# EAGLE board untitled (EAGLE 8.3.1)

Size 160 x 100 mm. Coordinates in mm from the lower left corner, seen from the top.
Outline: 0,0 160,0 160,100 0,100 0,0
Copper layers (1*16): Top 0.035mm / dielectric 1.5mm / Bottom 0.035mm
Design rules "default": minimum track width 6mil, minimum drill 0.35mm, track to track 6mil, track to pad 6mil, pad to pad 6mil, via to via 6mil, smd to smd 6mil, copper to edge 40mil, drill to drill 6mil, minimum pad ring 10mil, minimum via ring 8mil, stop-mask expansion 4mil, vias tented up to drill 0mil, thermal gap 10mil

## Footprints (pad centres in the part's own frame; a part is rotated, then mirrored left to right if it is on the bottom)
C0805K = smd 1.3 x 1.6: 1 -1,0; 2 1,0
C0805 = smd 1.3 x 1.5: 1 -0.95,0; 2 0.95,0
C15B6 = drill 1.016 pad 2.159 octagon: 1 -7.493,0; 2 7.493,0
SIP3 = drill 1 pad 1.676: 1 -2.54,0; 2 0,0; 3 2.54,0
DIL6-SMD = smd 1.78 x 1.52: 1 -2.54,-4.645; 2 0,-4.645; 3 2.54,-4.645; 4 2.54,4.645; 5 0,4.645; 6 -2.54,4.645
SOT23 = smd 1 x 1.4: 1 -0.95,-1.1; 2 0.95,-1.1; 3 0,1.1
M0805 = smd 1.3 x 1.6: 1 -0.95,0; 2 0.95,0
5501-1LED = drill 0.9 pad 1.5 square: 1A 0,3.81; 1B 0,-3.81; + -5.08,-3.81; - -5.08,3.81; NC 5.08,-3.81; NO 5.08,3.81 | hole 1.1: -7.62,3.81; 7.62,-3.81
TOP3L-1 = drill 1.397 long: A1 -5.588,-7.62; A2 0,-7.62; G 5.588,-7.62 | hole 4.115: 0,12.7
ESP8266-ESP12 = smd 2 x 1.2: 1 16.2,2; 2 16.2,4; 3 16.2,6; 4 16.2,8; 5 16.2,10; 6 16.2,12; 7 16.2,14; 8 16.2,16; 9 0,16; 10 0,14; 11 0,12; 12 0,10; 13 0,8; 14 0,6; 15 0,4; 16 0,2
SOIC16 = smd 0.635 x 1.524: 1 -4.445,-2.695; 2 -3.175,-2.695; 3 -1.905,-2.695; 4 -0.635,-2.695; 5 0.635,-2.695; 6 1.905,-2.695; 7 3.175,-2.695; 8 4.445,-2.695; 9 4.445,2.695; 10 3.175,2.695; 11 1.905,2.695; 12 0.635,2.695; 13 -0.635,2.695; 14 -1.905,2.695; 15 -3.175,2.695; 16 -4.445,2.695
MICRO-USB5+6P-SMD-0.65-AB = smd 0.4 x 1.35: 1 -1.3,2.875; 2 -0.65,2.875; 3 0,2.875; 4 0.65,2.875; 5 1.3,2.875 | smd 1.9 x 1.9: P1 -1.2,0; P2 1.2,0 | drill 0.508 pad 1.016 long: P3 -3.625,0; P4 3.625,0 | drill 0.8: P5 -2.425,2.73; P6 2.425,2.73
ESP-12 = smd 2 x 1.2: 1 -7.5,4.5; 2 -7.5,2.5; 3 -7.5,0.5; 4 -7.5,-1.5; 5 -7.5,-3.5; 6 -7.5,-5.5; 7 -7.5,-7.5; 8 -7.5,-9.5; 9 7.5,-9.5; 10 7.5,-7.5; 11 7.5,-5.5; 12 7.5,-3.5; 13 7.5,-1.5; 14 7.5,0.5; 15 7.5,2.5; 16 7.5,4.5

## Placement (x,y rotation side)
C1  100uF  [C0805K]  -41.91,55.88 0 top  (outside the outline)
C2  470pF  [C0805K]  -16.51,63.5 0 top  (outside the outline)
C3  10uF  [C0805]  -40.64,-31.75 0 top  (outside the outline)
C4  100nF  [C0805]  -40.64,-38.1 0 top  (outside the outline)
C5  470pF  [C0805]  -40.64,-90.17 0 top  (outside the outline)
C6  10uF  [C0805]  -40.64,-96.52 0 top  (outside the outline)
C7  470pF  [C0805K]  -41.91,-175.26 0 top  (outside the outline)
C8  [C15B6]  -58.42,-267.97 0 top  (outside the outline)
C9  [C15B6]  -58.42,-289.56 0 top  (outside the outline)
DC1  R-78C3.3-1.0  [SIP3]  -31.75,-77.47 0 top  (outside the outline)
OK1  MOC3031S  [DIL6-SMD]  -36.83,-190.5 0 top  (outside the outline)
OK2  MOC3031S  [DIL6-SMD]  -69.85,-251.46 0 top  (outside the outline)
Q1  S8050  [SOT23]  -40.64,-3.81 0 top  (outside the outline)
Q2  S8050  [SOT23]  -40.64,-11.43 0 top  (outside the outline)
R1  12k  [M0805]  -15.24,57.15 0 top  (outside the outline)
R2  12k  [M0805]  -20.32,57.15 0 top  (outside the outline)
R3  12k  [M0805]  -25.4,57.15 0 top  (outside the outline)
R4  12k  [M0805]  -30.48,57.15 0 top  (outside the outline)
R5  12k  [M0805]  -35.56,57.15 0 top  (outside the outline)
R6  12k  [M0805]  -40.64,-19.05 0 top  (outside the outline)
R7  12k  [M0805]  -40.64,-25.4 0 top  (outside the outline)
R8  470R  [M0805]  -40.64,-44.45 0 top  (outside the outline)
R9  470R  [M0805]  -40.64,-50.8 0 top  (outside the outline)
R10  12k  [M0805]  -40.64,-149.86 0 top  (outside the outline)
R12  12k  [M0805]  -40.64,-162.56 0 top  (outside the outline)
R14  100R  [M0805]  -40.64,-199.39 0 top  (outside the outline)
R15  220R  [M0805]  -74.93,-205.74 0 top  (outside the outline)
R16  100R  [M0805]  -62.23,-248.92 0 top  (outside the outline)
R17  220R  [M0805]  -55.88,-248.92 0 top  (outside the outline)
S1  5501-1LED  [5501-1LED]  -30.48,-111.76 0 top  (outside the outline)
T1  BTA26-H  [TOP3L-1]  -60.96,-184.15 0 top  (outside the outline)
T2  BTA26-H  [TOP3L-1]  -60.96,-227.33 0 top  (outside the outline)
U$1  ESP8266_ESP-12  [ESP8266-ESP12]  -30.48,29.21 0 top  (outside the outline)
U$2  CH340G  [SOIC16]  -36.83,31.75 0 top  (outside the outline)
USB1  ZX62-B-5PA  [MICRO-USB5+6P-SMD-0.65-AB]  -34.29,-63.5 0 top  (outside the outline)
X1  [ESP-12]  -21.59,13.97 0 top  (outside the outline)

## Library data of the parts
C1-C7 R6-R9 = rcl
C8 C9 = capacitor-wima
DC1 = dc-dc-converter
OK1 OK2 = optocoupler; MF: FAIRCHILD SEMICONDUCTOR; MPN: MOC3031SM; OC_FARNELL: unknown; OC_NEWARK: 34C1335
Q1 Q2 = semicon-smd-ipc
R1-R5 R10 R12 R14-R17 = resistor
S1 = switch
T1 T2 = triac
U$1 = ESP8266_ESP-12
U$2 = usb-serial
USB1 = Seeed-Connector; MPN: ZX62-B-5PA
X1 = adafruit

## Nets
+3V1: R2.2
+3V2: R3.2
+3V3: C1.1 C5.1 C6.1 DC1.3 R1.2 R4.2 S1.NC X1.8
+5V: DC1.1 USB1.1
A1_LIVE_OUT: T1.A2 T2.A2
A2_LIVE_IN: R15.1 R17.1 T1.A1 T2.A1
BUTT_L: C7.1 R12.1 S1.1A S1.1B X1.14
BUTT_R: X1.13
EN: R3.1 X1.3
GND: C1.2 C2.2 C3.2 C4.2 C5.2 C6.2 C7.2 DC1.2 OK1.2 OK2.2 R5.2 R12.2 S1.- U$2.1 USB1.5 USB1.P1 USB1.P2 USB1.P3 USB1.P4 USB1.P5 USB1.P6 X1.9
GPIO0: Q2.3 R1.1 X1.12
GPIO2: R2.1 X1.11
GPIO15: R5.1 X1.10
LIVE_IN: C8.1
N$1: C3.1 C4.1 U$2.16
N$2: Q1.1 R6.1
N$3: Q2.2 R6.2 U$2.13
N$4: Q1.2 R7.2 U$2.14
N$5: Q2.1 R7.1
N$6: U$2.5 USB1.3
N$7: R8.1 U$2.2
N$8: R9.1 U$2.3
N$9: U$2.6 USB1.2
N$10: R10.1 S1.+
N$12: OK1.1 R14.1
N$13: OK1.6 R15.2
N$14: OK1.4 T1.G
N$15: OK2.1 R16.1
N$16: OK2.6 R17.2
N$17: OK2.4 T2.G
NRST: C2.1 Q1.3 R4.1 X1.1
RXD0: R8.2 X1.15
SW_L: R10.2 R14.2 X1.6
SW_R: R16.2 X1.7
TXD0: R9.2 X1.16
XI: U$2.7
XO: U$2.8

## Tracks (layer width: path | path; a pad name or v marks a point on that pad's centre or on a via)
+3V3  (7 unrouted)
+5V  (1 unrouted)
A1_LIVE_OUT  (1 unrouted)
A2_LIVE_IN  (3 unrouted)
BUTT_L  (4 unrouted)
EN  (1 unrouted)
GND  (21 unrouted)
GPIO0  (2 unrouted)
GPIO2  (1 unrouted)
GPIO15  (1 unrouted)
N$1  (2 unrouted)
N$2  (1 unrouted)
N$3  (2 unrouted)
N$4  (2 unrouted)
N$5  (1 unrouted)
N$6  (1 unrouted)
N$7  (1 unrouted)
N$8  (1 unrouted)
N$9  (1 unrouted)
N$10  (1 unrouted)
N$12  (1 unrouted)
N$13  (1 unrouted)
N$14  (1 unrouted)
N$15  (1 unrouted)
N$16  (1 unrouted)
N$17  (1 unrouted)
NRST  (3 unrouted)
RXD0  (1 unrouted)
SW_L  (2 unrouted)
SW_R  (1 unrouted)
TXD0  (1 unrouted)